# Altium PCB triumvi_v11_sensing.PcbDoc
Units mil, origin at the board's own origin, x right, y up, seen from the top; angles counter-clockwise.
Board outline 1100 x 1020 mil, 4 copper layers (Top Layer, GND, Signal Layer 2, Bottom Layer), stack 30.634 mil thick; 69 components, 54 nets, 235 pads, 81 vias.
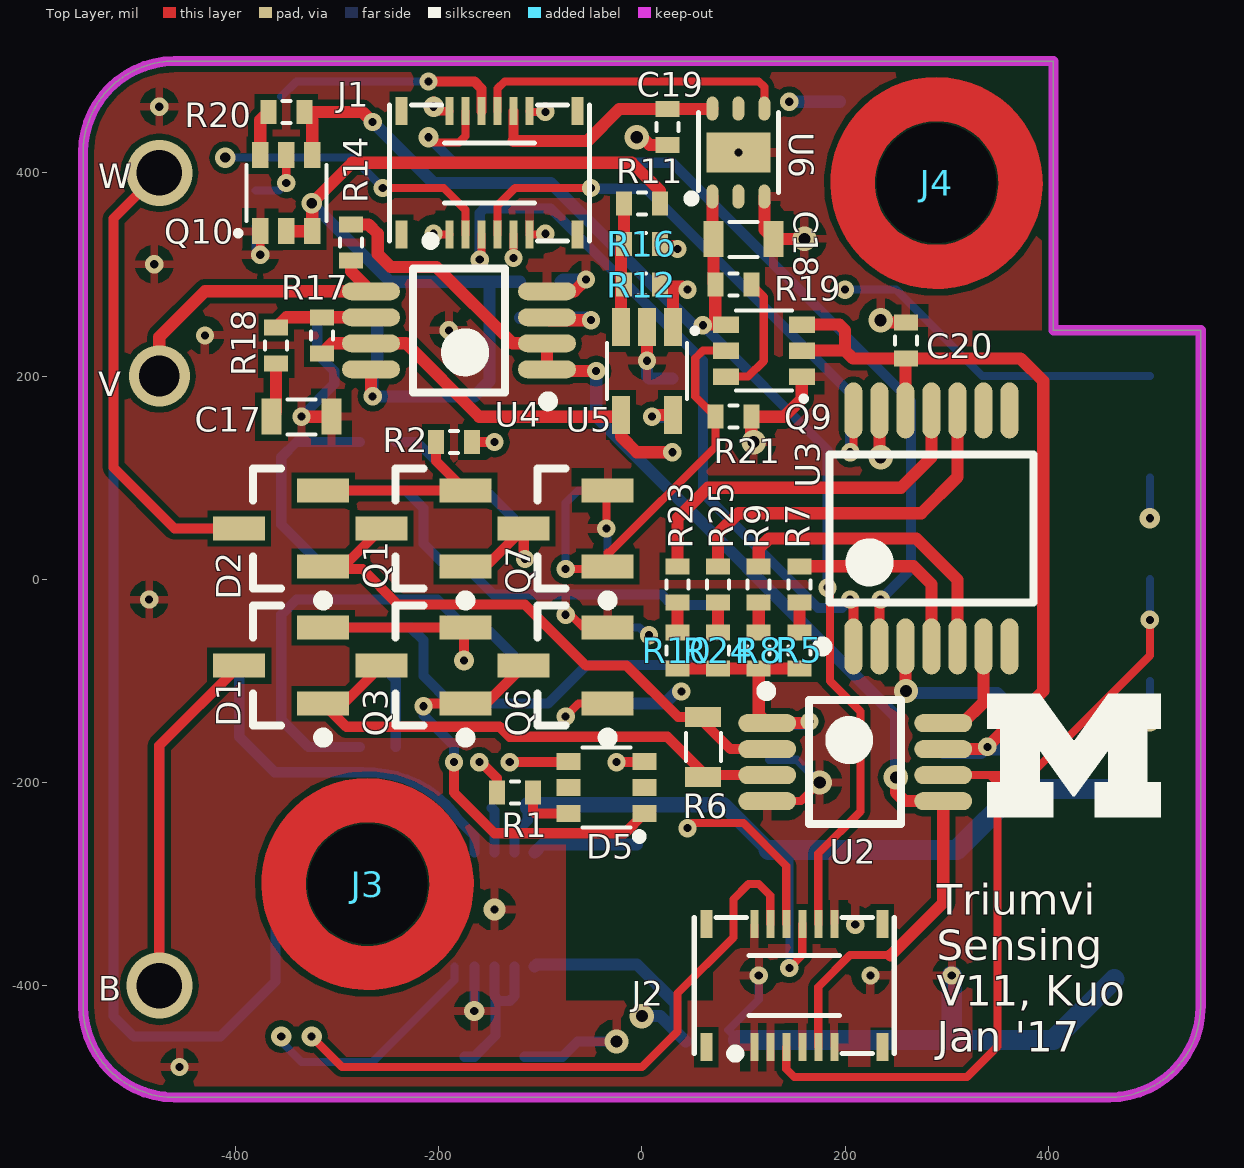
[diagram p0: Top Layer view]
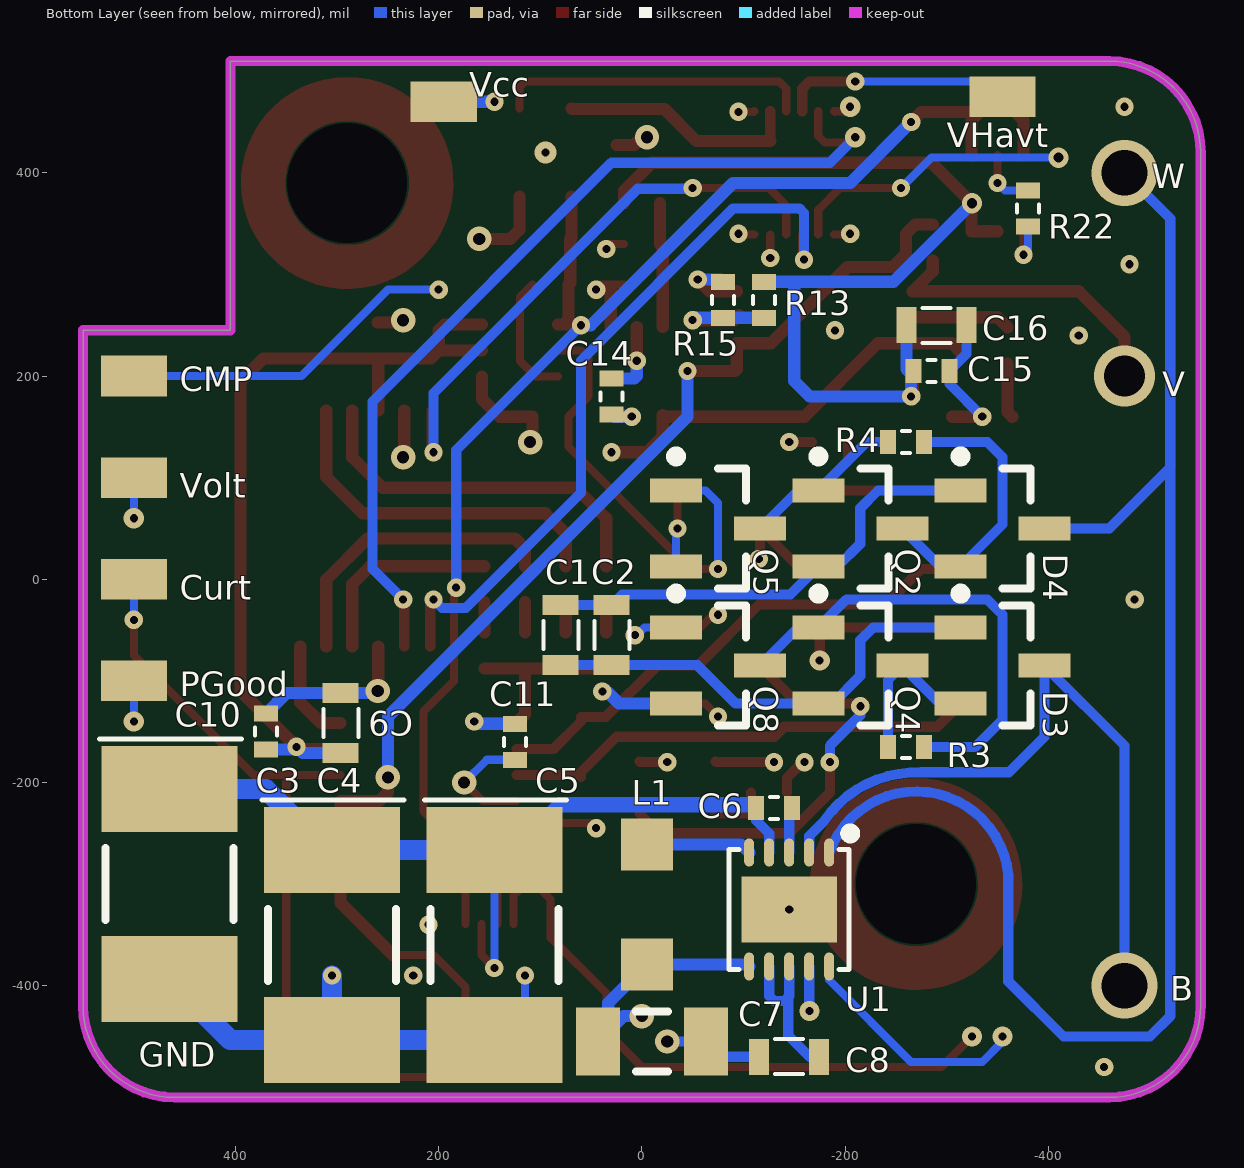
[diagram p1: Bottom Layer view, seen from below]
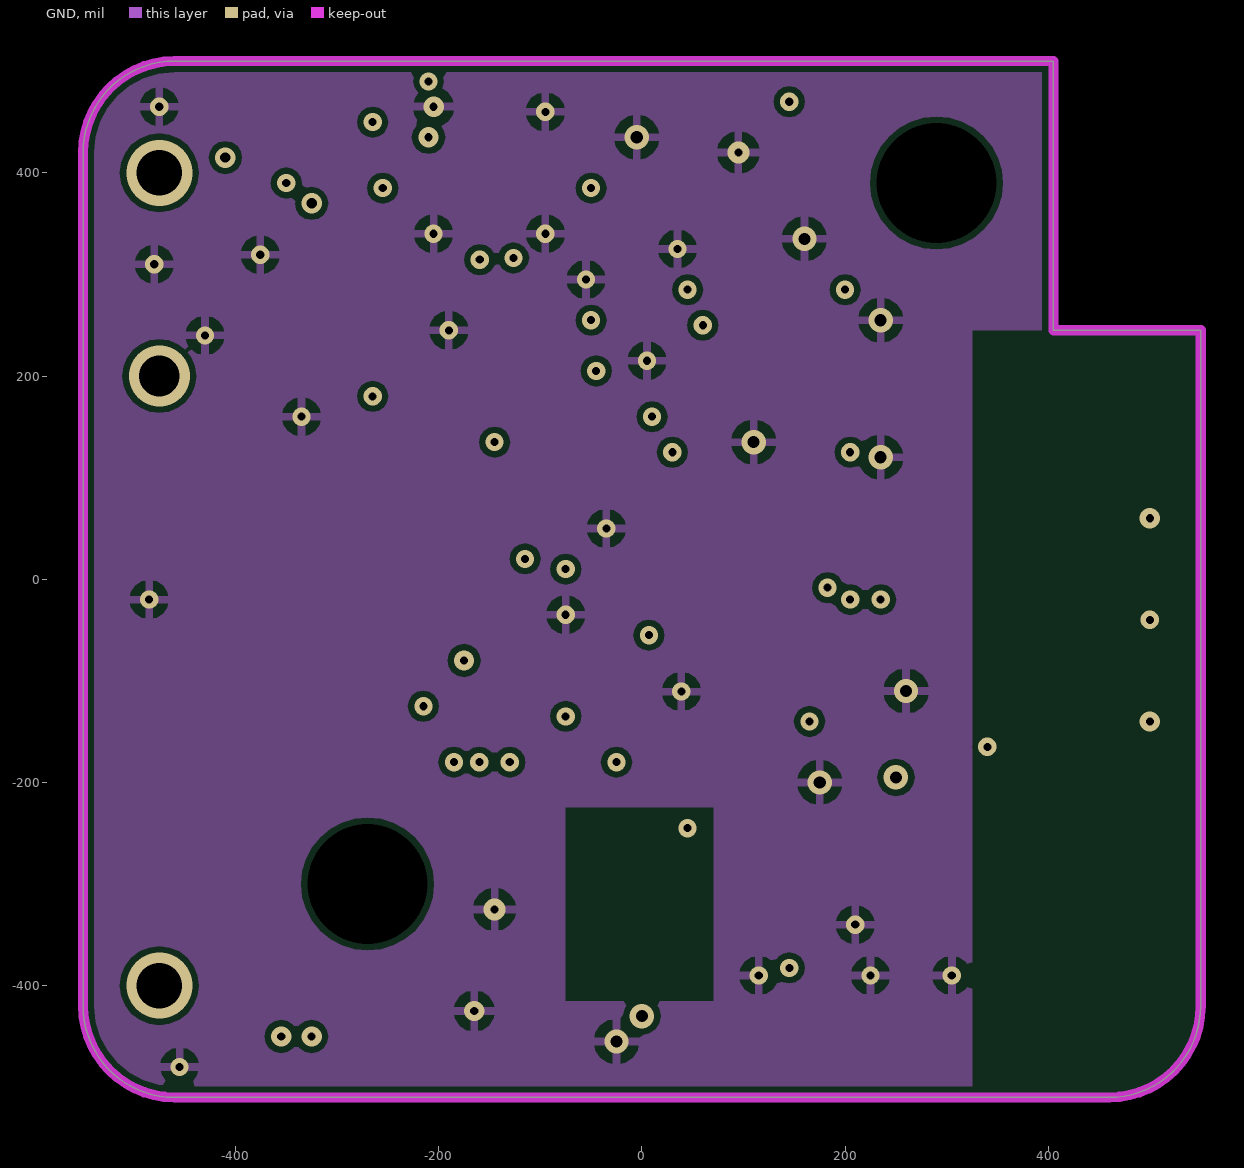
[diagram p2: GND]
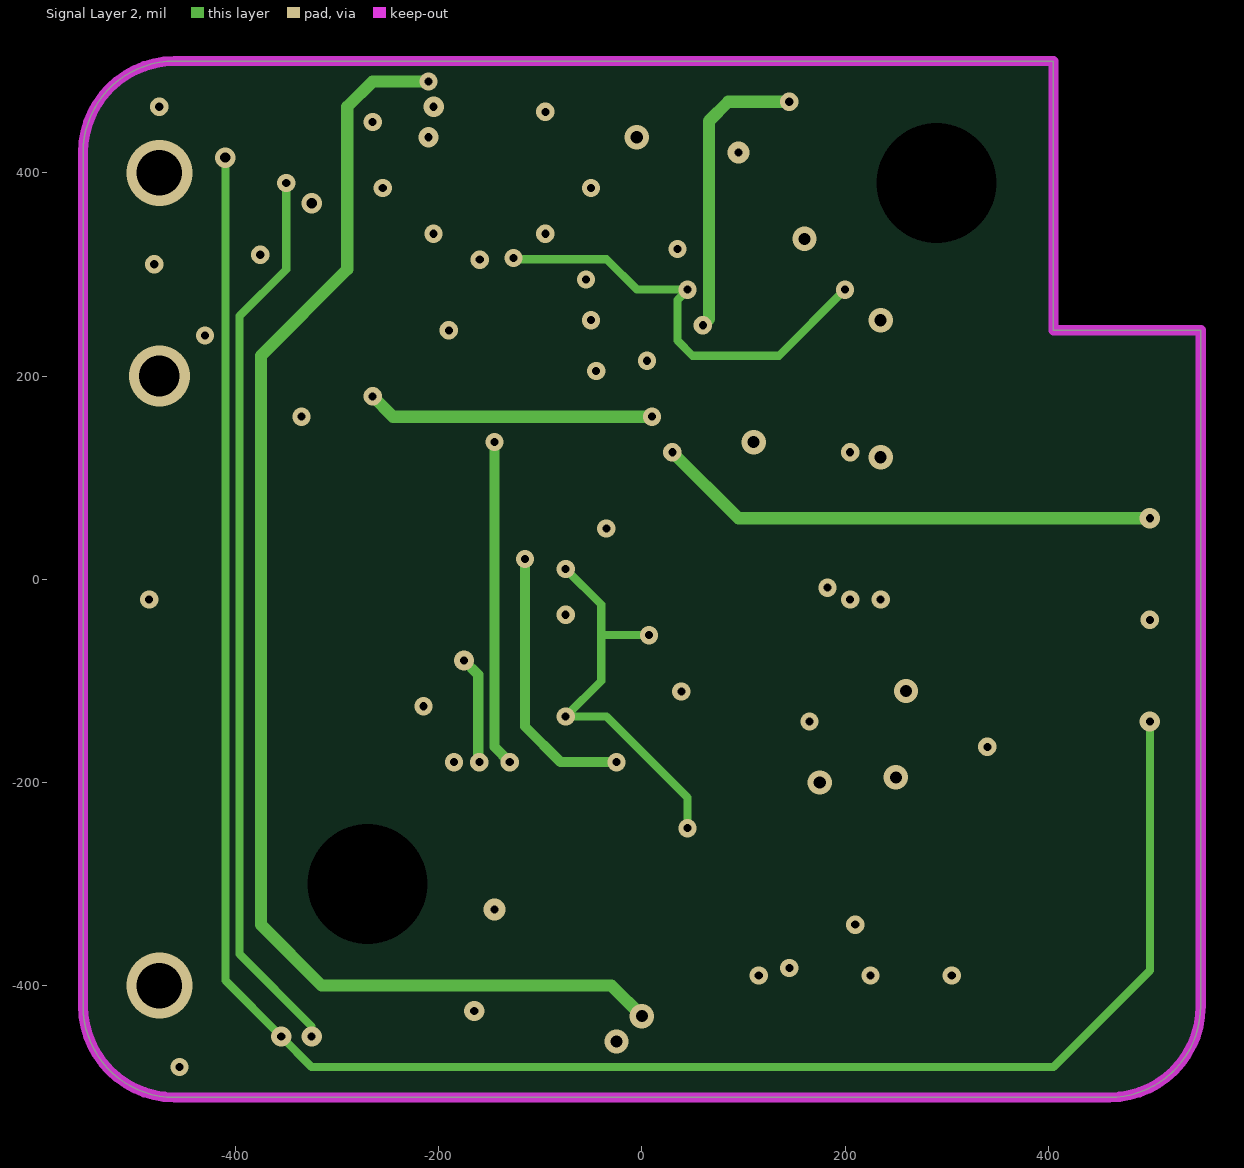
[diagram p3: Signal Layer 2]

## Layer stack, top to bottom
Top Solder: solder mask 0.4, Solder Resist, Dk 3.5
Top Layer: signal copper 1.4
Dielectric 1: core 10, FR-4, Dk 4.2
GND: signal copper 1.417
Dielectric 3: prepreg 5, Dk 4.2
Signal Layer 2: signal copper 1.417
Dielectric 2: core 10, Dk 4.2
Bottom Layer: signal copper 1.4
Bottom Solder: solder mask 0.4, Solder Resist, Dk 3.5

## Board outline
-550,-420 -550,420 cw(c-460,420) -460,510 405,510 405,245 550,245 550,-420 cw(c460,-420) 460,-510 -460,-510 cw(c-460,-420)

## Design rules (kind name [scope] priority, off if disabled: settings)
Clearance "non plated holes" [InPadClass('NPHOLES')] p1: gap=10 // Sunstone Circuits Minimum Clearance Rule (MLB~4&6 Layer Designs)
Clearance "Clearance~Sunstone Circuits" [All] p2: gap=6 // Sunstone Circuits Minimum Clearance Rule (MLB~4&6 Layer Designs)
DiffPairsRouting [All] p1: maxlimit=10 minlimit=10 mostfreqgap=10 toplayer_minwidth=6 toplayer_maxwidth=15 toplayer_prefwidth=15 midlayer1_minwidth=6 midlayer1_maxwidth=15 midlayer1_prefwidth=15 midlayer2_minwidth=6 midlayer2_maxwidth=15 midlayer2_prefwidth=15 bottomlayer_minwidth=6 bottomlayer_maxwidth=15 bottomlayer_prefwidth=15 maxuncoupledlength=500
HoleSize "HoleSize~Sunstone Circuits" [All] p1: absolutevalues=TRUE maxlimit=251 minlimit=8 maxpercent=80.000 minpercent=20.000 // Sunstone Circuits Hole Size Rule (MLB~4&6 Layer Designs)
HoleSize Testpoint [All] p2: absolutevalues=TRUE maxlimit=100 minlimit=1 maxpercent=80.000 minpercent=20.000
HoleSize TestPointUsage [All] p3: absolutevalues=TRUE maxlimit=100 minlimit=1 maxpercent=80.000 minpercent=20.000
MinimumAnnularRing "MinimumAnnularRing~Sunstone Circuits" [All] p1 off: minimumring=7 // Sunstone Circuits Minimum Annular Ring (MLB~4&6 Layer Designs)
MinimumSolderMaskSliver [All] p1 off: minsoldermaskwidth=10
PlaneClearance "PlaneClearance~Sunstone Circuits" [All] p1: clearance=12 // Sunstone Circuits Power Plane Clearance Rule (MLB~4&6 Layer Designs)
PlaneConnect "PlaneConnect~Sunstone Circuits" [All] p1: planeconnectstyle=Relief reliefexpansion=10 reliefentries=4 reliefconductorwidth=8 reliefairgap=10 // Sunstone Circuits Power Plane Connect Rule (MLB~4&6 Layer Designs)
PolygonConnect "PolygonConnect~Sunstone Circuits" [All] p1: connectstyle=Relief reliefconductorwidth=8 reliefentries=4 polygonreliefangle="90 Angle" airgapwidth=10 // Sunstone Circuits Polygon Connect Style (MLB~4&6 Layer Designs)
RoomDefinition U_Power_supply [InComponentClass('U_Power_supply')] p1 off: confinementstyle=ConfineIn formatcopy=TRUE lockcomponents=FALSE outline -412.44,316.84 -412.44,443.16 -392.48,443.16 -392.48,488.7 -47.99,488.7 -47.99,527.99 97.99,527.99 97.99,506.26 149.61,506.26 327.48,506.26 327.48,243.7 327.48,212.44 363.16,212.44 363.16,187.48 403.7,187.48 403.7,102.52 363.16,102.52 363.16,98.66 236.84,98.66 236.84,316.84
RoomDefinition U_Connectors [InComponentClass('U_Connectors')] p2 off: confinementstyle=ConfineIn formatcopy=TRUE lockcomponents=FALSE outline -260.93,312.59 -260.93,487.41 -39.07,487.41 260.93,487.41 260.93,-312.59 260.93,-487.41 39.07,-487.41 39.07,312.59
RoomDefinition U_Energy_harvesting [InComponentClass('U_Energy_harvesting')] p3 off: confinementstyle=ConfineIn formatcopy=TRUE lockcomponents=FALSE outline -419.88,-412.76 -419.88,-230.35 -362.48,-230.35 -362.48,-196.3 96.3,-196.3 96.3,-142.52 193.7,-142.52 193.7,-203.35 332.76,-203.35 332.76,-516.65 -137.76,-516.65 -137.76,-511.26 -359.61,-511.26 -359.61,-412.76
RoomDefinition U_CT_switching [InComponentClass('U_CT_switching')] p4 off: confinementstyle=ConfineIn formatcopy=TRUE lockcomponents=FALSE outline -443.74,-175.71 -443.74,140.71 -302.48,140.71 -302.48,163.7 -217.52,163.7 -142.52,163.7 -142.52,140.71 13.74,140.71 13.74,1.26 114.61,1.26 114.61,-111.26 113.7,-111.26 113.7,-227.48 27.21,-227.48 27.21,-270.43 -97.21,-270.43 -97.21,-213.7 -222.48,-213.7 -222.48,-203.7 -357.48,-203.7 -357.48,-175.71
RoomDefinition U_IV_sensing [InComponentClass('U_IV_sensing')] p5 off: confinementstyle=ConfineIn formatcopy=TRUE lockcomponents=FALSE outline -391.26,125.39 -391.26,194.61 -388.7,194.61 -388.7,272.48 -349.61,272.48 -349.61,286.26 -315,286.26 -315,326.85 -292.48,326.85 -292.48,363.7 -37.48,363.7 -37.48,403.7 47.48,403.7 47.48,280.01 67.44,280.01 67.44,273.7 222.48,273.7 222.48,178.66 248.66,178.66 248.66,82.48 278.7,82.48 278.7,21.26 304.61,21.26 304.61,-91.26 243.86,-91.26 243.86,-151.85 53.39,-151.85 53.39,-2.48 41.3,-2.48 41.3,1.46 35.39,1.46 35.39,125.39
RoutingVias "RoutingVias~Sunstone Circuits" [All] p1: holewidth=16 width=30 viastyle="Through Hole" minholewidth=6 minwidth=18 maxholewidth=20 maxwidth=40 // Sunstone Circuits Routing Vias Rule (MLB~4&6 Layer Designs)
ShortCircuit "ShortCircuit~Sunstone Circuits" [All] p1: allowed=FALSE // Sunstone Circuits Short Circuit Rule~Do Not Allow (MLB~4&6 Layer Designs)
SilkToSilkClearance [All] p1 off: silktosilkclearance=10
SilkToSolderMaskClearance [IsPad] p1 off: minsilkscreentomaskgap=10 clearancetoexposedcopper=TRUE
SolderMaskExpansion TentVias [isVia] p1: expansion=-20 // Sunstone Circuits Solder Mask Expansion Rule (MLB~4&6 Layer Designs)
SolderMaskExpansion "SolderMaskExpansion~Sunstone Circuits" [All] p2: expansion=3 // Sunstone Circuits Solder Mask Expansion Rule (MLB~4&6 Layer Designs)
ViasUnderSMD "ViasUnderSMD~Sunstone Circuits" [All] p1: allowed=FALSE // Sunstone Circuits Vias Under SMD~Do Not Allow (MLB~4&6 Layer Designs)
Width "Width~Sunstone Circuits" [All] p1: maxlimit=100 minlimit=6 preferedwidth=10 // Sunstone Circuits Minimum Width Rule (MLB~4&6 Layer Designs)
22 further rules are at their usual default settings.

## Classes and differential pairs
component class U_Power_supply: C18 C19 Q9 Q10 R19 R20 R21 R22 U6
component class U_IV_sensing: C9 C10 C11 C14 C15 C16 C17 C20 R5 R7 R8 R9 R10 R11 R12 R13 R14 R15 R16 R17 R18 R23 R24 R25 U2 U3 U4 U5
component class U_Energy_harvesting: C3 C4 C5 C6 C7 C8 L1 U1
component class U_CT_switching: C1 C2 D1 D2 D3 D4 D5 Q1 Q2 Q3 Q4 Q5 Q6 Q7 Q8 R1 R2 R3 R4 R6
component class U_Connectors: J1 J2

## Components (designator, comment, footprint, x,y, rotation, side; value= is the part's Value field where it differs from the comment)
C1 "0.068u" 0603 80,-55 r90 bottom
C2 "10000p" 0603 30,-55 r90 bottom
C3 "220u" 2312 465,-300 r270 bottom
C4 "220u" 2312 305,-360 r270 bottom
C5 "220u" 2312 145,-360 r270 bottom
C6 "1u" 0402 -130,-225 r180 bottom
C7 "100u" 1206 -10,-455 r180 bottom
C8 "4.7u" 0603 -145,-470 r0 bottom
C9 "10u" 0603 296.61,-141.61 r90 bottom
C10 "0.1u" 0402 370,-150 r90 bottom
C11 "18p" 0402 125,-160 r270 bottom
C14 "0.1u" 0402 30,180 r90 bottom
C15 "0.1u" 0402 -285,205 r180 bottom
C16 "10u" 0603 -290,250 r180 bottom
C17 "10u" 0603 -335,160 r0 top
C18 "4.7u" 0603 100,335 r0 top
C19 "1u" 0402 25,445 r270 top
C20 "0.1u" 0402 260,235 r90 top
D1 "D_BAS40-04" SOT23-3 -355,-85 r180 top
D2 "D_BAS40-04" SOT23-3 -355,50 r180 top
D3 "D_BAS40-04" SOT23-3 -355,-85 r180 bottom
D4 "D_BAS40-04" SOT23-3 -355,50 r180 bottom
D5 "BAS40TW" SOT-363 -35,-205 r90 top
J1 "DF40B(2.0)-12DS-0.4V" DF40B(2.0)-12DS-0.4V -150,400 r0 top locked
J2 "DF40B(2.0)-12DS-0.4V" DF40B(2.0)-12DS-0.4V 150,-400 r0 top
J3 "9774020243R" 9774020243R -270,-300 r0 top
J4 "9774020243R" 9774020243R 290,390 r0 top
L1 "10u" CDRH2D18 -5,-320 r90 bottom
Q1 "Si2367DS" SOT23-3 -215,50 r180 top
Q2 "Si2342DS" SOT23-3 -215,50 r180 bottom
Q3 "Si2367DS" SOT23-3 -215,-85 r180 top
Q4 "Si2342DS" SOT23-3 -215,-85 r180 bottom
Q5 "Si2338DS" SOT23-3 -75,50 r180 bottom
Q6 "Si2338DS" SOT23-3 -75,-85 r180 top
Q7 "Si2338DS" SOT23-3 -75,50 r180 top
Q8 "Si2338DS" SOT23-3 -75,-85 r180 bottom
Q9 "Si1865DDL" SC70-6 120,225 r90 top
Q10 "Si1865DDL" SC70-6 -350,380 r0 top
R1 "47k" 0402 -125,-210 r0 top
R2 "47k" 0402 -185,135 r0 top
R3 "1Meg" 0402 -260,-165 r180 bottom
R4 "1Meg" 0402 -260,135 r0 bottom
R5 "887" 0402 155,-70 r90 top
R6 "Chip resistor" 0603 60,-165 r90 top
R7 "48.7k" 0402 155,-5 r90 top
R8 "249" 0402 115,-70 r90 top
R9 "24.3k" 0402 115,-5 r90 top
R10 "80.6" 0402 35,-70 r90 top
R11 "100k" 0402 0,370 r180 top
R12 "2Meg" 0402 0,290 r0 top
R13 "1Meg" 0402 -120,275 r270 bottom
R14 "100k" 0402 -286.36,331.36 r270 top
R15 "1Meg" 0402 -80,275 r90 bottom
R16 "100k" 0402 0,330 r0 top
R17 "47k" 0402 -315,240 r270 top
R18 "100" 0402 -360,230 r270 top
R19 "1Meg" 0402 90,290 r0 top
R20 "1Meg" 0402 -350,460 r180 top
R21 "1Meg" 0402 90,160 r0 top
R22 "1Meg" 0402 -380,365 r270 bottom
R23 "12k" 0402 35,-5 r90 top
R24 "69.8" 0402 75,-70 r90 top
R25 "5.76k" 0402 75,-5 r90 top
U1 "LTC3588EDD-1#PBF" QFN-10 -145,-325 r270 bottom
U2 "INA333" MSOP-8 210,-180 r0 top
U3 "ADG604" TSSOP-14 285,50 r90 top
U4 "MCP6032" MSOP-8 -180,245 r180 top
U5 "TS881" SC70-5 5,205 r180 top
U6 "ADP151_LFCSP" CP-6-3 95,420 r90 top

## Footprints (in the part's own frame and the unit in brackets; to place one, negate y for a bottom-side part, rotate by r counter-clockwise, add the part's x,y. Pads: shape width x height; smd on the part's side, far side on the other; paste and mask are expansions set on the pad)
0402 [mm] "2-Leads, Body 1.00x0.50mm, IPC Medium Density"
  rect 0.4x0.6 smd: 1(-0.45,0) 2(0.45,0)
  silkscreen extent -0.1,-0.28 0.1,0.28, body extent -0.53,-0.28 0.53,0.27, height 0.4
0603 [mm] "2-Leads, Body 1.55x0.85mm, IPC Medium Density"
  rect 0.5x0.9 smd: 1(-0.75,0) 2(0.75,0)
  silkscreen extent -0.35,-0.45 0.35,0.43, body extent -0.75,-0.42 0.75,0.43, height 0.5
1206 [mm]
  rect 1.1x1.7 smd: 1(-1.35,0) 2(1.35,0)
  silkscreen extent -0.4,-0.75 0.4,0.75, body extent -1.7,-0.9 1.7,0.9, height 1.3
2312 [mm] "Chip Capacitor, 2-Leads, Body 6.00x3.20mm, IPC Medium Density"
  rect 2.15x3.4 smd: 1(-2.375,0) 2(2.375,0)
  silkscreen extent -3.62,-1.75 0.9,1.8, body extent -3.1,-1.7 3.1,1.7, height 2.6
9774020243R [mm] "m2 standoff, 2mm stack height"
  round 0 hole 3 unplated: ""(0,0)
  Top Layer region: 1.55,0 2.65,0 2.649,0.088 2.644,0.176 2.644,0.176 2.625,0.175 1.55,0.175 1.54,0.177 1.547,0.088 1.55,0
  Top Layer region: 2.65,0 2.302,-1.312 1.35,-2.28 0.044,-2.65 -1.274,-2.324 -2.257,-1.388 -2.649,-0.088 -2.345,1.235 -1.426,2.234 -0.132,2.647 1.196,2.365 2.21,1.462 2.644,0.176 2.644,0.176 2.625,0.175 1.55,0.175 1.54,0.177 1.254,0.911 0.644,1.41 -0.133,1.544 -0.875,1.279 -1.391,0.684 -1.547,-0.089 -1.304,-0.838 -0.723,-1.371 0.044,-1.549 0.8,-1.327 1.35,-0.762 1.55,0 1.55,0
  body extent -2.17,-2.17 2.18,2.17, height 2
CDRH2D18 [mm] "Sumdia SMD power inductor"
  rect 1.3x1.3 smd: 1(-1.5,0) 2(1.5,0)
  body extent -1.5,-1.7 1.5,1.8, height 2
CP-6-3 [mm] "QFN, 6-Leads, Body 2.00x2.00mm, Pitch 0.65mm, Thermal Pad 1.00x1.55mm, IPC Medium Density"
  oval 0.6x0.3 smd: 1(-1.1,0.65) 2(-1.1,0) 3(-1.1,-0.65) 4(1.1,-0.65) 5(1.1,0) 6(1.1,0.65)
  rect 1x1.6 smd: 7(0,0)
  silkscreen extent -1.25,-1 1,1.27, body extent -1,-1 1,1, height 0.6
DF40B(2.0)-12DS-0.4V [mm] "Hirose DF40 Series, 0.4 mm pitch, 2.0 mm stack height, 12 positions"
  rect 0.2x0.7 smd: 1(-1,-1.54) 2(-0.6,-1.54) 3(-0.2,-1.54) 4(0.2,-1.54) 5(0.6,-1.54) 6(1,-1.54) 7(1,1.54) 8(0.6,1.54) 9(0.2,1.54) 10(-0.2,1.54) 11(-0.6,1.54) 12(-1,1.54)
  rect 0.3x0.7 smd: ""(-2.2,-1.54) ""(-2.2,1.54) ""(2.2,-1.54) ""(2.2,1.54)
  silkscreen extent -2.5,-1.8 2.5,1.7, body extent -2.5,-1.69 2.5,1.69, height 1.9
MSOP-8 [mm] "TSOP, 8-Leads, Body 3.00x3.00mm, Pitch 0.65mm, IPC Medium Density"
  oval 1.45x0.45 smd: 1(-2.2,0.975) 2(-2.2,0.325) 3(-2.2,-0.325) 4(-2.2,-0.975) 5(2.2,-0.975) 6(2.2,-0.325) 7(2.2,0.325) 8(2.2,0.975)
  silkscreen extent -2.35,-1.55 1.15,1.9, body extent -1.55,-1.55 1.55,1.55, height 1.1
QFN-10 [mm] "QFN, 10-Leads, Body 4.00x4.00mm, Pitch 0.50mm, Thermal Pad 1.65x2.38mm, IPC Medium Density"
  oval 0.7x0.25 smd: 1(-1.425,1) 2(-1.425,0.5) 3(-1.425,0) 4(-1.425,-0.5) 5(-1.425,-1) 6(1.425,-1) 7(1.425,-0.5) 8(1.425,0) 9(1.425,0.5) 10(1.425,1)
  rect 1.65x2.38 smd: 11(0,0)
  silkscreen extent -2.02,-1.5 1.5,1.65, body extent -1.5,-1.5 1.5,1.5, height 0.75
SC70-5 [mm]
  rect 0.45x0.95 smd: 1(-0.65,-1.1) 2(0,-1.1) 3(0.65,-1.1) 4(0.65,1.1) 5(-0.65,1.1)
  silkscreen extent -1.21,-1 1,0.7, body extent -1,-0.7 1,0.7, height 1.1
SC70-6 [mm]
  rect 0.406x0.648 smd: 1(-0.65,-0.95) 2(0,-0.95) 3(0.65,-0.95) 4(0.65,0.95) 5(0,0.95) 6(-0.65,0.95)
  silkscreen extent -1.2,-1.01 1,0.7, body extent -1,-0.7 1,0.7, height 1.1
SOT23-3 [mm] "SOT23, 3-Leads, Body 2.9x1.3mm, Pitch 0.95mm, Lead Span 2.3mm, IPC Medium Density"
  rect 1.3x0.6 smd: 1(-1.05,0.95) 2(-1.05,-0.95) 3(1.05,0)
  silkscreen extent -1.18,-1.5 0.7,1.92, body extent -0.7,-1.5 0.7,1.5, height 1.2
SOT-363 [mm]
  rect 0.42x0.6 smd: 1(-0.65,-0.95) 2(0,-0.95) 3(0.65,-0.95) 4(0.65,0.95) 5(0,0.95) 6(-0.65,0.95)
  silkscreen extent -1.28,-0.88 1,0.6, body extent -1,-0.6 1,0.6, height 1
TSSOP-14 [mm] "TSOP, 14-Leads, Body 5.00x4.40mm, Pitch 0.65mm, IPC Medium Density"
  oval 1.4x0.45 smd: 1(-2.95,1.95) 2(-2.95,1.3) 3(-2.95,0.65) 4(-2.95,0) 5(-2.95,-0.65) 6(-2.95,-1.3) 7(-2.95,-1.95) 8(2.95,-1.95) 9(2.95,-1.3) 10(2.95,-0.65) 11(2.95,0) 12(2.95,0.65) 13(2.95,1.3) 14(2.95,1.95)
  silkscreen extent -3.07,-2.55 1.85,2.85, body extent -3.19,-2.55 3.19,2.55, height 1.1

## Part data
C1: library part C0603C683K5RACTU, "0.068μF ±10% 50V Ceramic Capacitor X7R 0603"
C2: library part C0603C103J5RACTU, "10000pF ∮5% 50V Ceramic Capacitor X7R 0603"
C3 C4 C5: library part TAJC227K010RNJ, "220μF ±10% Molded Tantalum Capacitors 10V 2312"
C6 C19: library part C1005X6S1C105K050BC, "1μF ±10% 16V Ceramic Capacitor X6S 0402"
C7: library part GRM31CR60J107ME39K, "100μF ±20% 6.3V Ceramic Capacitor X5R 1206"
C8 C18: library part CGB3B1X5R1A475K055AC, "4.7μF ±10% 10V Ceramic Capacitor X5R 0603"
C9 C16 C17: library part C1608X5R0J106M080AB, "10μF ±20% 6.3V Ceramic Capacitor X5R 0603"
C10 C14 C15 C20: library part GRM155R71C104KA88D, "0.10μF ±10% 16V Ceramic Capacitor X7R 0402"
C11: library part 500R07S180GV4T, "18pF ∮2% 50V Ceramic Capacitor C0G, NP0 0402"
D1 D2 D3 D4: "SURFACE MOUNT SCHOTTKY BARRIER DIODE"
D5: library part D_BAS40TW, "SURFACE MOUNT SCHOTTKY BARRIER DIODE ARRAYS"
J1 J2: "Hirose BM20 Series, 0.4mm pitch, 2mm stack height, 12 pos, header"
J3 J4: "2 mm stack height, m2 standoff"
L1: library part CDRH2D18/LDNP-100NC, "10μH Shielded Inductor 1A 180 mOhm Max Nonstandard"
Q1 Q3: "P-Channel 20 V (D-S) MOSFET"
Q2 Q4: "N-Channel 8 V (D-S) MOSFET"
Q5 Q6 Q7 Q8: "N-Channel 30 V (D-S) MOSFET"
Q9 Q10: "Load Switch with Level-Shift"
R1 R2 R17: library part CRCW040247K0FKED, "RES SMD 47K OHM 1% 1/16W 0402"
R3 R4 R13 R15 R19 R20 R21 R22: library part CRCW04021M00FKED, "RES SMD 1M OHM 1% 1/16W 0402"
R5: library part CRCW0402887RFKED, "RES SMD 887 OHM 1% 1/16W 0402"
R6: library part R_45.3_0603_0.1%, "Chip resistor, 45.3, 0603 package, 0.1%"
R7: library part RT0402DRD0748K7L, "RES SMD 48.7K OHM 0.5% 1/16W 0402"
R8: library part CRCW0402249RFKED, "RES SMD 249 OHM 1% 1/16W 0402"
R9: library part RC0402FR-0724K3L, "RES SMD 24.3K OHM 0.5% 1/16W 0402"
R10: library part CRCW040280R6FKED, "RES SMD 80.6 OHM 1% 1/16W 0402"
R11 R14 R16: library part CRCW0402100KFKED, "RES SMD 100K OHM 1% 1/16W 0402"
R12: library part CRCW04022M00FKED, "RES SMD 2M OHM 1% 1/16W 0402"
R18: library part CRCW0402100RFKED, "RES SMD 100 OHM 1% 1/16W 0402"
R23: library part RT0402DRD0712KL, "RES SMD 12K OHM 0.5% 1/16W 0402"
R24: library part CRCW040269R8FKED, "RES SMD 69.8 OHM 1% 1/16W 0402"
R25: library part RC0402FR-075K76L, "RES SMD 5.76K OHM 0.5% 1/16W 0402"
U1: "Piezoelectric Energy Harvesting Power Supply"
U2: "Micro-Power (50uA), Zero-Drift, Rail-to-Rail Out  Instrumentation Amplifier"
U3: "1 pC Charge Injection, 100 pA Leakage  CMOS  5 V/5 V/3 V 4-Channel Multiplexer"
U4: "0.9 μA, High Precision Op Amps"
U5: "Rail-to-rail 0.9 V nanopower comparator"
U6: "Ultralow Noise, 200 mA,  CMOS Linear Regulator"

## Free pads (board coordinates)
  rect 65x40 smd far side: ""(-355,475) ""(195,470) ""(500,-100) ""(500,0) ""(500,100) ""(500,200)

## Via types
v1: diameter 18, hole 8, Top Layer to Bottom Layer, 56 vias
v2: diameter 24, hole 12, Top Layer to Bottom Layer, 10 vias
v3: diameter 20, hole 8, Top Layer to Bottom Layer, 8 vias
v4: diameter 20, hole 10, Top Layer to Bottom Layer, 2 vias
v5: diameter 65, hole 45, Top Layer to Bottom Layer, 2 vias
v6: diameter 22, hole 8, Top Layer to Bottom Layer, 1 vias
v7: diameter 21.65, hole 8, Top Layer to Bottom Layer, 1 vias
v8: diameter 60, hole 40, Top Layer to Bottom Layer, 1 vias

## Nets (pads, with @x,y where several pads share a name; then routed paths per layer and width w, separated by ;. In a path a pad name is that pad's centre, name@x,y a point inside that pad or via, vN(x,y) a via of type N, cw(c..) or ccw(c..) an arc to the next point about the centre after c; other vN are vias at no path point)
CT1: D2.3 D4.3 U1.1 | length 1994.6
  Top Layer w10: v5(-475,400) -520,355 -520,110 -460,50 D2.3
  Bottom Layer w10: v5(-475,400) -520,355 -520,110 ; D4.3 -460,50 -520,110 ; U1.1 ccw(c-270,-300) -360.65,-290.93 -360.65,-395.65 -415,-450 -500,-450 -520,-430 -520,110
CT2: D1.3 D3.3 U1.2 | length 1049.6
  Top Layer w10: v5(-475,-400) -475,-163.66 D1.3
  Bottom Layer w10: v5(-475,-400) -475,-163.66 D3.3 -396.34,-155 -361.34,-190 -274.99,-190 ; -274.99,-190.3 cw(c-270,-300) -179.37,-237.99 -164.68,-252.68 U1.2
CURRENT_WAVEFORM: J2.3 pad.@500,0 U2.6 | length 842.4
  Top Layer w8: J2.3 142.13,-482.13 150,-490 320,-490 350,-460 350,-200 342.8,-192.8 ; U2.6 342.8,-192.8 ; v1(500,-40) 500,-75 382.2,-192.8 342.8,-192.8
  Bottom Layer w8: v1(500,-40) pad.@500,0
CURRENTMEASUREEN: J2.10 Q5.1 Q6.1 Q7.1 Q8.1 Q9.5 R21.1 | length 1113.3
  Top Layer w7: Q7.1@-36.26,10 Q7.1
  Top Layer w8: v1(-75,-135) -62.4,-122.4 Q6.1 ; v1(-75,10) Q7.1@-36.26,10 ; Q7.1 -33.66,26.34 -31.79,26.34 72.28,130.41 R21.1 52.5,179.78 52.5,217.5 60,225 Q9.5 ; v1(45,-245) 50,-240 100,-240 142.13,-282.13 J2.10
  Signal Layer 2 w8: v1(-75,10) -40,-25 -40,-55 ; v1(6.93,-55) -40,-55 ; v1(45,-245) 45,-215 -35,-135 v1(-75,-135) -40,-100 -40,-55
  Bottom Layer w8: v1(-75,10) -75,75 -62.6,87.4 Q5.1 ; Q8.1 -2.4,-47.6 5,-55 v1(6.93,-55)
GND: C3.2 C4.2 C5.2 C7.2 C8.2 C9.2 C10.2 C11.2 C14.2 C15.2 C16.2 C17.2 C18.2 C19.2 C20.2 J1.1 J1.6 J1.7 J1.12 J2.1 J2.2 J2.4 J2.6 J2.7 J2.12 Q5.2 Q6.2 Q7.2 Q8.2 Q9.1 Q10.1 R15.2 R16.2 R21.2 R22.2 U1.9 U1.11 U2.4 U3.3 U3.13 U4.4 U5.2 U6.3 U6.7 | length 1883
  Top Layer w8: v1(-375.59,319.41) Q10.1 ; v1(-205,340) -204.37,339.37 J1.1 ; v3@-205,471 v3(-205,465) -200.63,460.63 J1.12 J1.12@-190,460 ; J1.6 -95.63,339.37 v1(-95,340) ; J1.7 -110,460 v1(-95,460) ; v1(-75,-35) -70,-35 -57.4,-47.6 Q6.2 ; Q7.2@-36.26,90 -35,88.74 v1(-35,50) ; R16.2 30,330 v1(35,325) ; U2.4 156.61,-218.39 v2(175,-200)
  Top Layer w12: v1(-335,160) C17.2 ; U4.4 -66.61,283.39 v1(-55,295) ; v2(-5,435) 0,435 7.72,427.28 C19.2 ; v1(5,215) U5.2 ; v2(110,135) 107.72,137.28 R21.2 140,160 157.4,177.4 Q9.1 ; U6.3 120.59,343.94 C18.2 v2(160,335) ; U3.13 233.82,121.18 v2(235,120) ; v2(235,255) 237.28,252.72 C20.2 ; U3.3 259.41,-109.41 v2(260,-110)
  Bottom Layer w8: R22.2 -380,323.82 v1(-375.59,319.41) ; Q5.2@-35,13.94 Q5.2 -33.66,48.66 v1(-35,50) ; C5.2@95,-453.5 85,-443.5 115,-413.5 v1(115,-390) ; C11.2 152.72,-177.72 v2(175,-200)
  Bottom Layer w10: v1(-335,160) -302.72,192.28 C15.2 -319.53,221.81 C16.2 ; v3(-165,-425) -164.68,-424.68 U1.9 ; C8.2 -78.15,-470 C7.2 v2(-25,-455)
  Bottom Layer w12: R15.2 -77.72,295 v1(-55,295) ; Q8.2@-31.06,-125 Q8.2 22.6,-122.4 34.41,-110.59 v1(38.87,-110.59) ; v1(5,215) 5,200 7.28,197.72 C14.2 ; v2(260,-110) 262.09,-112.09 C9.2 349.8,-112.09 C10.2
  Bottom Layer w20: C5.2@95,-453.5 C5.2 C4.2 ; v1(305,-390) C4.2 ; C3.2 405,-453.5 C4.2
  other v1: -455,-480 225,-390 210,-340 -485,-20 -430,240 -190,245 -480,310 -475,465
  other v6: -145,-325
  other v7: 95,420
IN+: D1.1 Q3.3 R6.1 U2.3 | length 543.1
  Top Layer w10: Q3.3 -293.74,-122.4 D1.1 -290.85,-145.21 -140,-145.21 -130.21,-155 25,-155 60,-190 R6.1 61.73,-192.8 U2.3
IN-: D2.1 Q1.3 R6.2 U2.2 | length 587
  Top Layer w10: Q1.3 -293.74,12.6 D2.1 -311.06,10 -275,10 -240.21,-24.79 -115.21,-24.79 -55,-85 -15,-85 35.47,-135.47 R6.2 60,-140 87.2,-167.2 U2.2
NetC1_1: C1.1 C2.1 D3.1 Q4.2 | length 460.8
  Bottom Layer w10: D3.1 -227.4,-47.6 -215,-60 -215,-95 -187.6,-122.4 Q4.2 -92.4,-122.4 -54.53,-84.53 C2.1 C1.1
NetC1_2: C1.2 C2.2 D4.1 Q2.2 | length 460.9
  Bottom Layer w10: D4.1 -232.4,87.4 -215,70 -215,35 -192.6,12.6 Q2.2 -146.06,-15 19.53,-15 C2.2 C1.2
NetC6_2: C6.2 U1.3 | length 45
  Bottom Layer w10: C6.2 -145,-227.72 U1.3
NetC8_1: C8.1 U1.7 U1.8 | length 153.4
  Bottom Layer w10: C8.1 -165,-470 -144,-449 -144,-411 -145,-410 U1.8 ; -140,-415 -130,-415 -125.32,-410.32 U1.7
NetC17_1: C17.1 R18.2 | length 54.2
  Top Layer w12: C17.1 -360,164.53 R18.2
NetD1_2: D1.2 Q3.2 R1.1 | length 317.3
  Top Layer w10: D1.2 Q3.2 -175,-48.94 v3(-175,-80) ; v1(-160,-180) -158.28,-180 -142.72,-195.57 R1.1
  Signal Layer 2 w10: v3(-175,-80) -161,-94 -161,-179 v1(-160,-180)
NetD2_2: D2.2 Q1.2 R2.1 | length 199.6
  Top Layer w10: D2.2 Q1.2 -202.72,116.46 R2.1
NetD3_2: D3.2 Q4.3 R3.1 | length 158.6
  Bottom Layer w10: D3.2 -293.74,-122.4 Q4.3 -242.28,-99.06 R3.1
NetD4_2: D4.2 Q2.3 R4.1 | length 280.8
  Bottom Layer w10: R4.1 -340,135 -355,120 -355,53.94 D4.2 -293.74,12.6 Q2.3
NetD5_1: D5.1 Q3.1 Q6.3 | length 424.7
  Top Layer w10: v1(-215,-125) -212.4,-122.4 Q3.1 -153.74,-122.4 Q6.3 ; v1(-185,-180) -185,-210 -145,-250 -17.01,-250 D5.1
  Bottom Layer w10: v1(-215,-125) -215,-134.02 -185,-164.02 v1(-185,-180)
NetD5_3: D5.3 Q1.1 Q7.3 | length 400.5
  Top Layer w10: Q1.1 -153.74,12.6 Q7.3 -116.34,21.34 v1(-115,20) ; v1(-25,-180) 1.81,-180 D5.3
  Signal Layer 2 w10: v1(-115,20) -115,-145 -80,-180 v1(-25,-180)
NetD5_4: D5.4 R2.2 | length 401.3
  Top Layer w10: R2.2 v1(-145,135) ; v1(-130,-180) -72.99,-180 D5.4
  Signal Layer 2 w10: v1(-145,135) -145,-165 v1(-130,-180)
NetD5_6: D5.6 R1.2 | length 54.1
  Top Layer w10: R1.2 -107.28,-228.31 -105,-230.59 D5.6
NetJ1_9: J1.9 U6.4 | length 311.3
  Top Layer w8: J1.9 -142.13,482.87 -135,490 115,490 120.59,484.41 U6.4
NetL1_2: L1.2 U1.5 | length 103.9
  Bottom Layer w12: U1.5 -97.68,-260.94 L1.2
NetQ2_1: Q2.1 Q5.3 R4.2 | length 161.2
  Bottom Layer w10: R4.2 -221.26,135 Q2.1 -153.74,87.4 Q5.3
NetQ4_1: Q4.1 Q8.3 R3.2 | length 463.4
  Bottom Layer w10: R3.2 -328.3,-165 -355,-138.3 -355,-35 -340,-20 -201.26,-20 Q4.1 -153.74,-47.6 Q8.3
NetQ9_6: Q9.6 R19.2 | length 123.9
  Top Layer w8: Q9.6 104.41,199.41 120,215 120,277.72 R19.2
NetQ10_6: Q10.6 R20.2 | length 45.9
  Top Layer w12: Q10.6 -375.59,452.13 R20.2
NetR5_2: R5.2 R7.1 | length 29.6
  Top Layer w12: R5.2 R7.1
NetR7_2: R7.2 U3.4 | length 198.5
  Top Layer w12: R7.2 267.28,12.72 285,-5 U3.4
NetR8_2: R8.2 R9.1 | length 29.6
  Top Layer w12: R8.2 R9.1
NetR9_2: R9.2 U3.5 | length 299.4
  Top Layer w12: R9.2 115,30 125,40 270,40 310.59,-0.59 U3.5
NetR10_2: R10.2 R23.1 | length 29.6
  Top Layer w12: R10.2 R23.1
NetR11_2: R11.2 R12.1 R16.1 U5.3 | length 122.9
  Top Layer w12: U5.3 -20.59,327.13 R16.1 R11.2
NetR17_1: R17.1 R18.1 U4.6 | length 97.6
  Top Layer w12: R18.1 -349.92,257.8 U4.6
NetR23_2: R23.2 U3.11 | length 368.3
  Top Layer w12: R23.2 35,60 65,90 255,90 285,120 U3.11
NetR24_2: R24.2 R25.1 | length 29.6
  Top Layer w12: R24.2 R25.1
NetR25_2: R25.2 U3.10 | length 356.5
  Top Layer w12: R25.2 75,45 95,65 275,65 310.59,100.59 U3.10
PGOOD: J1.2 pad.@500,-100 U1.10 | length 2592
  Top Layer w8: v1(-255,385) -195,385 -173.62,363.62 J1.2
  Signal Layer 2 w8: v4(-410,415) -410,-395 v3(-355,-450) -325,-480 405,-480 500,-385 v3(500,-140)
  Bottom Layer w8: v4(-410,415) -285,415 v1(-255,385) ; v3(-355,-450) -355,-455 -335,-475 -265,-475 -184.37,-394.37 U1.10 ; v3(500,-140) pad.@500,-100
RG1: C11.1 R5.1 R8.1 R10.1 R24.1 U2.1 | length 260.6
  Top Layer w12: R10.1 R24.1 R8.1 ; R5.1 R8.1 ; v1(165,-140) 163.39,-141.61 U2.1 115,-133.23 R8.1
  Bottom Layer w12: C11.1 162.72,-142.28 v1(165,-140)
RG2: U2.8 U3.6 | length 103.2
  Top Layer w12: U2.8 315.89,-141.61 336.18,-121.32 U3.6
SW_A0: J1.3 U3.1 | length 727.8
  Top Layer w8: v1(-159.53,314.53) -157.87,316.19 J1.3
  Top Layer w10: v1(205,-20) 208.23,-23.23 U3.1
  Bottom Layer w10: v1(-159.53,314.53) -159.53,360.47 -155,365 -90,365 60,215 60,85 173.28,-28.28 196.72,-28.28 v1(205,-20)
SW_A1: J1.4 U3.14 | length 566.7
  Top Layer w8: J1.4 -142.13,367.87 -125,385 v1(-50,385) ; v1(205,125) 208.23,128.23 U3.14
  Bottom Layer w10: v1@-50,384.29 3.99,384.29 205,183.28 v1(205,125)
SW_EN: J1.11 U3.2 | length 902.1
  Top Layer w8: v3(-210,435) -205,430 -180,430 -173.62,436.38 J1.11
  Top Layer w10: U3.2 233.82,-21.18 v1(235,-20)
  Bottom Layer w10: v3(-210,435) -185,410 30,410 265,175 265,10 v1(235,-20)
V_HARVEST: C7.1 J1.10 L1.1 pad.@-355,475 U1.6 | length 1808.1
  Top Layer w10: v1(-210,490) -165,490 -157.87,482.87 J1.10
  Signal Layer 2 w12: v1(-210,490) -265,490 -290,465 -290,305 -375,220 -375,-340 -315,-400 -30,-400 v2(0,-430)
  Bottom Layer w8: pad.@-355,475 -340,490 v1(-210,490)
  Bottom Layer w12: U1.6 -103.58,-379.06 L1.1 33.15,-417.2 C7.1@33.15,-445 ; v2(0,-430) 18.15,-430 C7.1@33.15,-445 ; C7.1 C7.1@33.15,-445
V_SELECTED: C19.1 J1.8 U6.6 | length 238.3
  Top Layer w10: -126.38,431.38 J1.8
  Top Layer w12: -126.38,431.38 -53.62,431.38 -22.28,462.72 C19.1 68.82,462.72 U6.6
VCAP: C3.1 C4.1 C5.1 C6.1 J2.9 U1.4 | length 837.7
  Top Layer w8: v1(145.19,-382.59) 157.87,-369.9 J2.9
  Bottom Layer w8: C5.1 145.19,-266.68 v1(145.19,-382.59)
  Bottom Layer w10: U1.4 -125.32,-250.32 -112.28,-237.28 C6.1
  Bottom Layer w15: C6.1 -112.28,-221.85 80.36,-221.85 C5.1@125,-266.5
  Bottom Layer w20: C5.1@125,-266.5 C5.1 C4.1 310,-266.5 370,-206.5 C3.1
VCC3: C18.1 J2.8 pad.@195,470 Q9.4 Q10.4 R19.1 R20.1 U6.1 | length 1689
  Top Layer w8: J2.8 173.62,-270 215,-228.62 215,-130 185,-100 185,-10.51 v1(182.78,-8.28)
  Top Layer w12: Q10.4 -324.41,452.13 R20.1 -275,460 v1(-265,450) ; v1(60,250) 60.59,250.59 Q9.4@77.6,250.59 ; U6.1 69.41,336.06 C18.1 70.47,291.81 R19.1 72.28,255.91 Q9.4@77.6,250.59 ; Q9.4 Q9.4@77.6,250.59
  Signal Layer 2 w12: v1(-265,450) v1@-264.53,450 ; v1(60,250) 66,256 66,451 85,470 v1(145,470)
  Bottom Layer w10: v1(60,250) 182.78,127.22 v1(182.78,-8.28)
  Bottom Layer w12: v1(-265,450) -205,390 -89.7,390 50.3,250 v1(60,250) ; v1(145,470) pad.@195,470
VCC3_GATED1: C14.1 C15.1 C16.1 Q10.2 Q10.3 R11.1 R13.1 U4.8 U5.5 | length 1313.2
  Top Layer w12: Q10.2 Q10.3 -324.41,369.41 v4(-325,370) -285,410 -10,410 17.72,382.28 R11.1 ; U4.8 -266.61,181.61 v1(-265,180) ; v1(10,160) 11.69,161.69 U5.5
  Signal Layer 2 w12: v1(-265,180) -245,160 v1(10,160)
  Bottom Layer w12: v4(-325,370) -247.72,292.72 -150,292.72 ; C16.1 -260.47,206.81 -265,202.28 v1(-265,180) -165,180 -150,195 -150,292.72 ; R13.1 -150,292.72 ; v1(10,160) C14.1@27.28,160
VCC3_GATED2: C9.1 C10.1 C20.1 Q9.2 Q9.3 U2.7 U3.12 | length 870.2
  Top Layer w12: Q9.2 200,225 ; Q9.3 194.41,250.59 200,245 200,225 ; U3.12 C20.1@259.41,217.28 ; U2.7 337.8,-167.2 v1(340,-165) 395,-110 395,195 372.72,217.28 C20.1 C20.1@259.41,217.28 ; 200,225 207.72,217.28 C20.1@259.41,217.28
  Bottom Layer w12: C9.1 333.86,-171.14 v1(340,-165) 342.72,-167.72 C10.1
VOLTAGE_WAVEFORM: pad.@500,100 R17.2 U4.7 U5.4 | length 949.2
  Top Layer w8: v3@500,55 v3(500,60)
  Top Layer w12: R17.2 -305.08,232.2 U4.7 -232.2,232.2 -160,160 -22.28,160 U5.4 -20.59,140.59 -5,125 v1(30,125)
  Signal Layer 2 w12: v1(30,125) 95,60 v3(500,60)
  Bottom Layer w8: v3(500,60) pad.@500,100
VOLTAGEMEASUREEN: J2.11 Q10.5 R22.1 | length 1563.9
  Top Layer w8: v1(-350,390) Q10.5 ; v3(-325,-450) -295,-480 0,-480 35,-445 35,-407.44 90,-352.44 90,-315 105,-300 115,-300 126.38,-311.38 J2.11
  Signal Layer 2 w8: v1(-350,390) -350,305 -396,259 -396,-369 -325,-440 v3(-325,-450)
  Bottom Layer w8: R22.1 -357.28,382.72 v1(-350,390)
VOLTAGESENSEIN: R14.2 U4.5 | length 303.8
  Top Layer w12: v8(-475,200) -475,238.39 -430,283.39 U4.5 -286.36,303.13 R14.2
VOLTAGETRIGGER: J1.5 pad.@500,200 R12.2 U5.1 | length 863.1
  Top Layer w8: v1(-126.38,316.19) J1.5 ; R12.2 40,290 v1(45,285)
  Top Layer w12: U5.1 30.59,287.13
  Signal Layer 2 w8: v1(-126.38,316.19) -125.19,315 -35,315 -5,285 v1(45,285) 35,275 35,235 50,220 135,220 v1(200,285)
  Bottom Layer w8: v1(200,285) 250,285 335,200 pad.@500,200
VREF: R13.2 R15.1 U4.3 | length 118.6
  Top Layer w12: U4.3@-95.59,260 U4.3 -90.59,255 v1(-50,255)
  Bottom Layer w12: R13.2 R15.1 -52.28,257.28 v1(-50,255)
VREF_BUF: J2.5 R14.1 U2.5 U4.1 U4.2 | length 1231.3
  Top Layer w8: J2.5 173.62,-401.38 205,-370 245,-370
  Top Layer w12: R14.1 -269.07,349.07 -260,340 -260,320 -247.28,307.28 -202.28,307.28 -127.2,232.2 U4.2 U4.1 -91.77,205 v1(-45,205) ; 245,-370 296.61,-318.39 U2.5 258.39,-218.39 250,-210 v2@250,-195.36
  Bottom Layer w12: v1(-45,205) -45,160 250,-135 v2(250,-195)
pads on no net: D5.2 D5.5 J1. J2. J3. J4. U3.7 U3.8 U3.9 U6.2 U6.5

## Polygon pours and split planes (outlines as drawn)
GND on GND "Top Layer-No Net" (solid, pour order 8): -550,-420 -550,420 cw(c-460,420) -460,510 405,510 405,245 550,245 550,-420 cw(c460,-420) 460,-510 -460,-510 cw(c-460,-420)
GND on Top Layer "Top Layer-No Net" (solid, remove dead copper, pour order 10): -550,-420 -550,420 cw(c-460,420) -460,510 405,510 405,245 550,245 550,-420 cw(c460,-420) 460,-510 -460,-510 cw(c-460,-420)

## Keep-outs
Keep-Out Layer:
  the board outline again, w10

## Other copper
Top Layer:
  pour cut-out: 70,-415 70,-225 -75,-225 -75,-415
  pour cut-out: 325,245 325,-510 550,-510 550,245
GND:
  pour cut-out: 325,245 325,-510 550,-510 550,245
  pour cut-out: 70,-415 70,-225 -75,-225 -75,-415

## Silkscreen, mask and mechanical layers (free items; w line width, h text height)
Top Overlay:
  region: 340,-234.32 404.96,-234.32 404.96,-199.64 391.75,-199.64 391.75,-168.26 423.95,-213.4 426.16,-213.4 458.91,-168.26 458.91,-199.64 445.7,-199.64 445.7,-234.32 510.66,-234.32 510.66,-199.64 497.45,-199.64 497.45,-147.34 510.66,-147.34 510.66,-112.66 459.19,-112.66 426.16,-158.35 424.5,-158.35 391.47,-112.66 340,-112.66 340,-147.34 352.66,-147.34 352.66,-199.64 340,-199.64
  text "W" at -535,385 h24
  text "V" at -535,180 h24
  text "B" at -535,-415 h24
  text "Triumvi / Sensing / V11, Kuo / Jan '17" at 290,-465 h30
Bottom Overlay:
  text "Vcc" at 170,475 h24
  text "VHavt" at -300,425 h24
  text "W" at -535,385 h24
  text "CMP" at 455,185 h24
  text "V" at -535,180 h24
  text "Volt" at 455,80 h24
  text "Curt" at 455,-20 h24
  text "PGood" at 455,-115 h24
  text "B" at -520,-415 h24
  text "GND" at 495,-480 h24
Mechanical 14:
  lines w10: -560,-420 ccw(c-460,-420) -460,-520 460,-520 ccw(c460,-420) 560,-420 ; -560,420 cw(c-460,420) -460,520 415,520 415,255 620,255
Mechanical 16:
  lines w10: -559,-610 -559,610 ; 561,-610 561,610